# EAGLE board LIS331DLH (EAGLE 7.1.0)
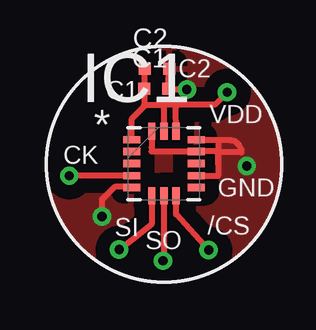
[diagram p0: board, top side]
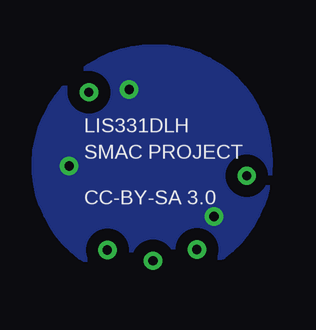
[diagram p1: board, bottom side, seen from below]

No outline drawn. Coordinates in mm, seen from the top.
Copper layers (1*16): Top 0.035mm / dielectric 1.5mm / Bottom 0.035mm
Design rules "2_layer_standard_4pcb": minimum track width 5mil, minimum drill 15mil, track to track 6mil, track to pad 6mil, pad to pad 6mil, via to via 6mil, smd to smd 0mil, copper to edge 6mil, drill to drill 6mil, minimum pad ring 7.5mil, minimum via ring 7.5mil, stop-mask expansion 4mil, vias tented up to drill 15mil, thermal gap 20mil

## Footprints (pad centres in the part's own frame; a part is rotated, then mirrored left to right if it is on the bottom)
C0402 = smd 0.5 x 0.5: 1 -0.508,0; 2 0.508,0
LGA16R50P3X5_300X300X100 = smd 0.711 x 0.305: 1 -1.346,0.991; 2 -1.346,0.508; 3 -1.346,0; 4 -1.346,-0.508; 5 -1.346,-0.991; 9 1.346,-0.991; 10 1.346,-0.508; 11 1.346,0; 12 1.346,0.508; 13 1.346,0.991 | smd 0.305 x 0.711: 6 -0.508,-1.346; 7 0,-1.346; 8 0.508,-1.346; 14 0.508,1.346; 15 0,1.346; 16 -0.508,1.346

## Placement (x,y rotation side)
C1  100n  [C0402]  -0.32,3.12 0 top
C2  10u  [C0402]  -0.29,3.95 0 top
GOLD_ORB_SM2  OSHWLOGO_REF_SM  [OSHW2REF]  6.66,-3.45 0 top
IC1  LIS331DLH  [LGA16R50P3X5_300X300X100]  0,0 0 top

## Library data of the parts
C1 C2 = rc-master-smd
GOLD_ORB_SM2 = bfl
IC1 = lis331dlh; MPN: LIS331DLH; OC_FARNELL: 1838523; OC_NEWARK: 09R4846; PACKAGE: LGA-16; SUPPLIER: STMicroelectronics

## Nets
/CS: IC1.8
GND: C1.2 C2.2 IC1.5 IC1.10 IC1.12 IC1.13 IC1.16
SDI: IC1.6
SDO: IC1.7
SPC: IC1.4
VDD: C1.1 C2.1 IC1.1 IC1.14 IC1.15

## Tracks (layer width: path | path; a pad name or v marks a point on that pad's centre or on a via)
/CS  (via drill 0.38 pad 0.76)
  Top 0.25: v1.86,-3.6 0.5,-2.12 IC1.8
GND  (via drill 0.38 pad 0.76)
  Top 0.25: IC1.5 -1.36,-0.97 -2.06,-0.97 -2.58,-1.5 v-2.58,-2.2 | 0.19,3.23 C1.2 | IC1.10 2.26,-0.51 2.26,0.49 | 2.26,-0.02 2.26,0.49 | 2.26,0.49 2.24,0.51 IC1.12 -0.52,0.51 -0.52,0.67 IC1.16 | C2.2 0.19,3.95 C1.2 | C1.2 0.19,3.09 v0.95,3.09 | 2.26,0.49 2.26,0.99 IC1.13 2.7,0.99 arc-90 3.22,0.46 2.28,0.46 arc-90 2.26,0.49
  other vias: 3.45,-0.1
  pour Bottom (isolate 0.5): -4.91,0.08 -4.91,0.05 arc90 0,-4.85 arc98 4.86,0.53 arc82 -0.14,4.88 arc90 -4.9,0.14
  pour Top (isolate 0.6): -4.86,0.09 -4.86,0.06 arc90 -0.1,-4.87 arc98 4.83,0.66 arc82 0.03,4.78 arc90 -4.85,0.15
SDI  (via drill 0.38 pad 0.76)
  Top 0.25: IC1.6 -0.51,-2.54 -1.24,-3.11 v-1.87,-3.58
SDO  (via drill 0.38 pad 0.76)
  Top 0.25: IC1.7 0,-4.01 arc-90 v-0.04,-4.05
SPC  (via drill 0.38 pad 0.76)
  Top 0.25: IC1.4 | IC1.4 v-3.95,-0.51
VDD  (via drill 0.38 pad 0.76)
  Top 0.25: 0,2.46 IC1.15 | IC1.14 0.5,2.33 0.5,2.46 | 0.5,2.46 0,2.46 | v2.63,2.97 2.13,2.46 0.5,2.46 | IC1.1 -1.34,1 -1.34,1.87 -0.75,2.46 | -0.75,2.46 0,2.46 | C2.1 -0.83,4.07 C1.1 -0.83,2.46 -0.75,2.46

## Text on the board
tPlace: C2 | C1 | VDD | CK | GND | SI | /CS | SO
bPlace: LIS331DLH | SMAC PROJECT | CC-BY-SA 3.0
Reference: http://smacproject.org